# Altium PCB Copy of PCB1.PcbDoc
Units mil, origin at the board's own origin, x right, y up, seen from the top; angles counter-clockwise.
Board outline 6000 x 4000 mil, 2 copper layers (Top Layer, Bottom Layer); 46 components, 42 nets, 185 pads, 0 vias.
Unrouted connection lines stored in the file: 111.
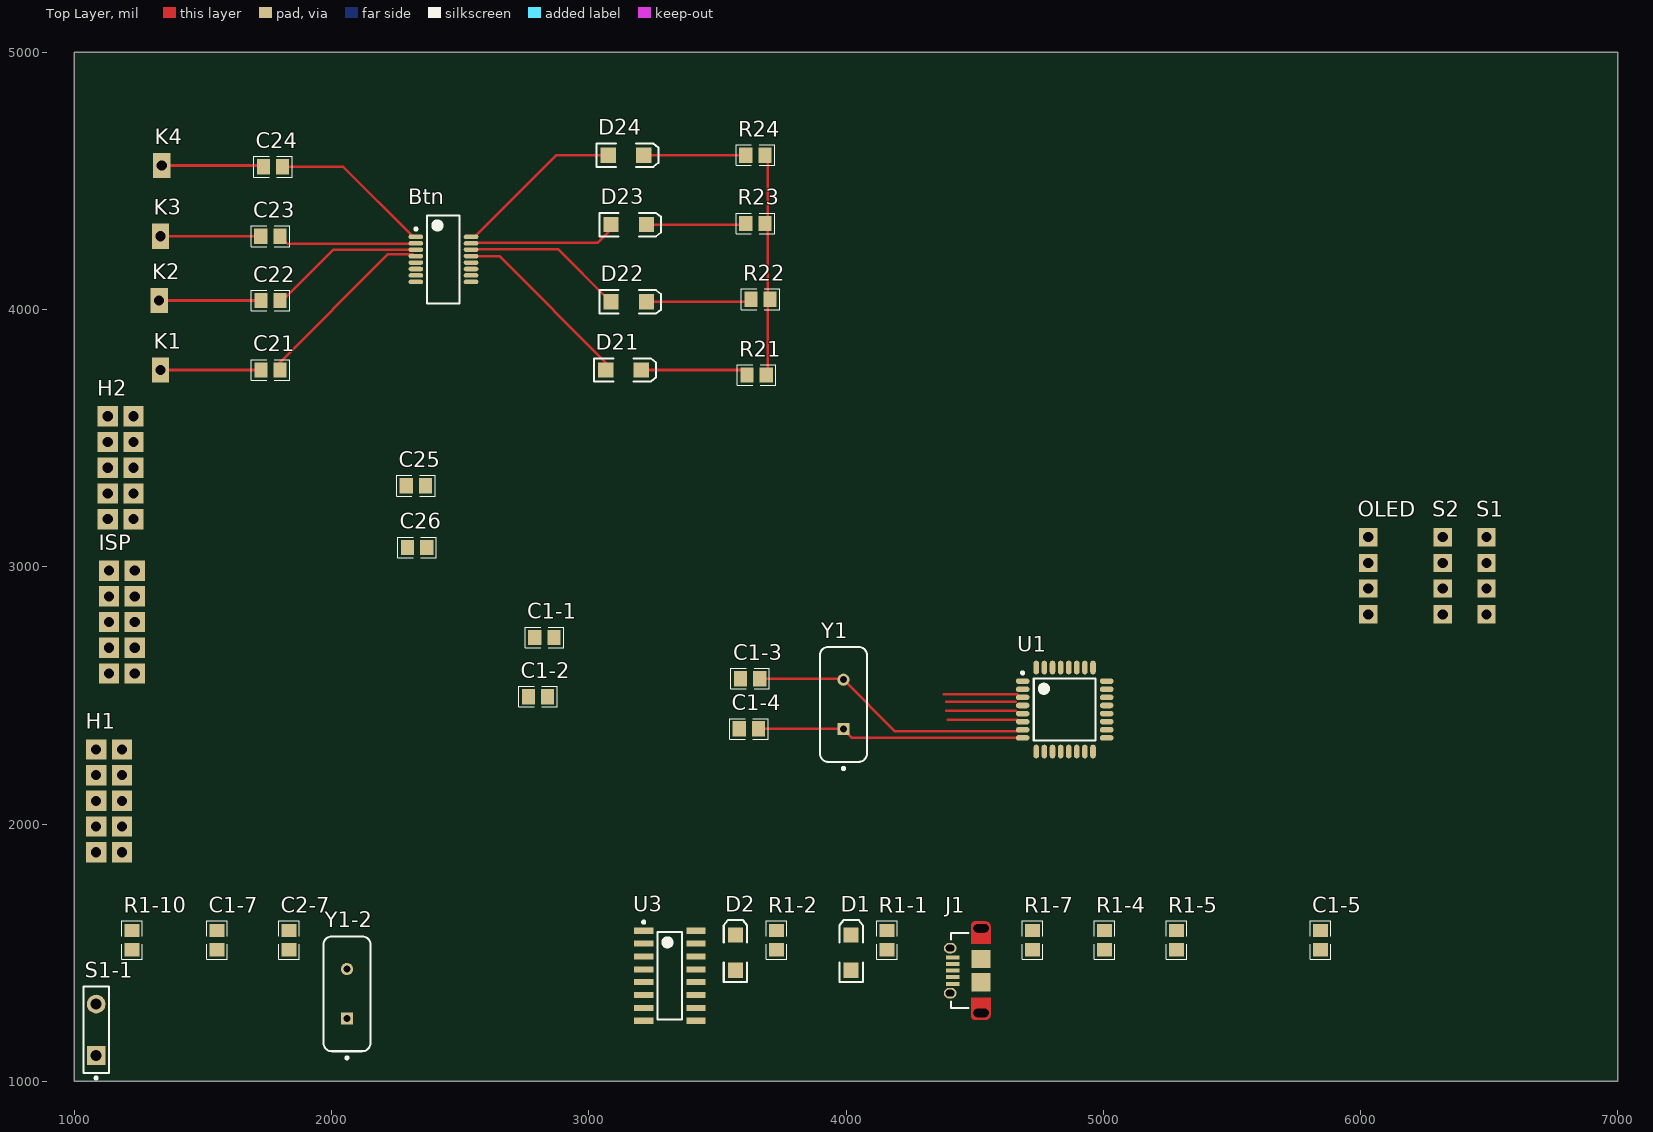
[diagram p0: Top Layer view]
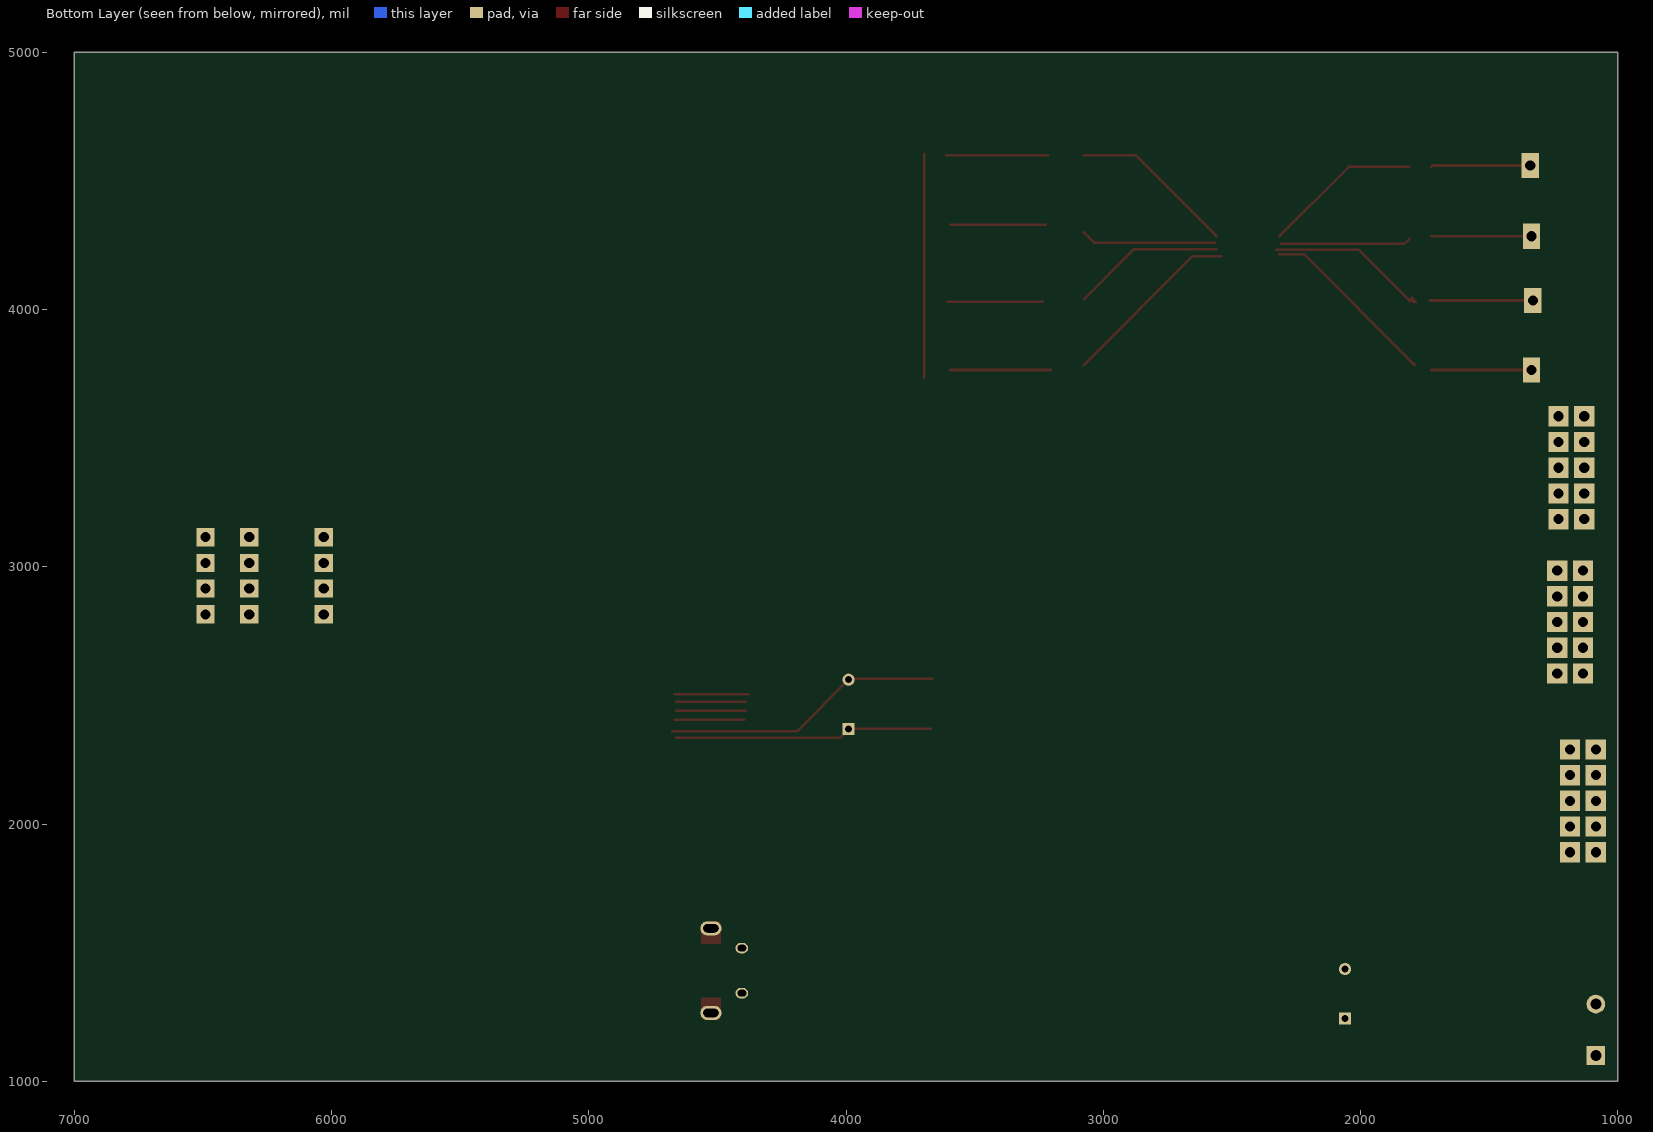
[diagram p1: Bottom Layer view, seen from below]

## Layer stack, top to bottom
Top Solder: solder mask 0.4, Solder Resist, Dk 3.5
Top Layer: signal copper 1.4
Dielectric 1: dielectric 12.6, FR-4, Dk 4.8
Bottom Layer: signal copper 1.4
Bottom Solder: solder mask 0.4, Solder Resist, Dk 3.5

## Board outline
1000,1000 7000,1000 7000,5000 1000,5000

## Design rules (kind name [scope] priority, off if disabled: settings)
AcuteAngle [All] p1: minimum=9.00000000000000E+0001 checktracksonly=FALSE
Clearance [All] p1: gap=6 ignorepadtopadclearanceinfootprint=TRUE
HoleSize [All] p1: absolutevalues=TRUE maxlimit=200 minlimit=1 maxpercent=80.000 minpercent=20.000
PolygonConnect [All] p1: connectstyle=Relief reliefconductorwidth=10 reliefentries=4 polygonreliefangle="90 Angle" airgapwidth=10
RoomDefinition TTP224 [InComponentClass('TTP224')] p1: confinementstyle=ConfineIn formatcopy=TRUE lockcomponents=FALSE outline 0,0 2000,0 2000,1000 0,1000
RoomDefinition main [InComponentClass('main')] p2: confinementstyle=ConfineIn formatcopy=TRUE lockcomponents=FALSE outline 7045,1060 7445,1060 7445,1560 7045,1560
RoutingVias [All] p1: holewidth=28 width=30 viastyle="Through Hole" minholewidth=28 minwidth=20 maxholewidth=28 maxwidth=50
SolderMaskExpansion [All] p1: expansion=4 istentingtop=FALSE
UnRoutedNet [All] p1: checkbadconnections=TRUE
Width [All] p1: maxlimit=30 minlimit=10 preferedwidth=15
28 further rules are at their usual default settings.

## Classes and differential pairs
component class TTP224: Btn C21 C22 C23 C24 C25 C26 D21 D22 D23 D24 H1 H2 K1 K2 K3 K4 R21 R22 R23 R24
component class main: C1-1 C1-2 C1-3 C1-4 C1-5 C1-7 C2-7 D1 D2 ISP J1 OLED R1-1 R1-2 R1-4 R1-5 R1-7 R1-10 S1 S1-1 S2 U1 U3 Y1 Y1-2

## Components (designator, comment, footprint, x,y, rotation, side; value= is the part's Value field where it differs from the comment)
Btn "Btn" SOP64P600X175-16N 2435,4195 r0 top
C1-1 "CAP" 0805 2154.29,3529.84 r0 top value=0.1uF
C1-2 "CAP" 0805 2129.29,3299.84 r0 top value=0.1uF
C1-3 "CAP" 0805 2954.29,3369.84 r0 top value=0.1uF
C1-4 "CAP" 0805 2949.29,3174.84 r0 top value=0.1uF
C1-5 "CAP" 0805 5040,875 r90 top value=0.1uF
C1-7 "CAP" 0805 750,875 r90 top value=22pF
C2-7 "CAP" 0805 1030,875 r90 top value=22pF
C21 "CAP" 0805 1089.29,4569.84 r0 top value=30pF
C22 "CAP" 0805 1089.29,4839.84 r0 top value=30pF
C23 "CAP" 0805 1089.09,5089.84 r0 top value=30pF
C24 "CAP" 0805 1099.09,5359.84 r0 top value=30pF
C25 "CAP" 0805 1654.29,4119.84 r0 top value=30pF
C26 "CAP" 0805 1659.29,3879.84 r0 top value=30pF
D1 "LED2" 3.2X1.6X1.1 4020,1500 r90 top
D2 "LED2" 3.2X1.6X1.1 3570,1500 r90 top
D21 "LED2" 3.2X1.6X1.1 3135,3765 r0 top
D22 "LED2" 3.2X1.6X1.1 3155,4030 r0 top
D23 "LED2" 3.2X1.6X1.1 3155,4330 r0 top
D24 "LED2" 3.2X1.6X1.1 3145,4600 r0 top
H1 "Header 2x5" "Header 2x5 male" 1085,2290 r0 top
H2 "Header 2x5" "Header 2x5 male" 1130,3585 r0 top
ISP "Header 2x5" "Header 2x5 male" 1135,2985 r0 top
J1 "629105150921" 629105150921 4525,1430 r90 top
K1 "Header 1x1" "Header 1x1 long" 1335,3765 r0 top
K2 "Header 1x1" "Header 1x1 long" 1330,4035 r0 top
K3 "Header 1x1" "Header 1x1 long" 1335,4285 r0 top
K4 "Header 1x1" "Header 1x1 long" 1340,4560 r0 top
OLED "Header 1x4" "Header 1x4 male" 6030,3015 r90 top
R1-1 "RES" 0805 3355,875 r90 top
R1-2 "RES" 0805 2925,875 r90 top
R1-4 "RES" 0805 4200,875 r90 top
R1-5 "RES" 0805 4480,875 r90 top
R1-7 "RES" 0805 3920,875 r90 top
R1-10 "RES" 0805 420,875 r90 top
R21 "RES" 0805 2979.09,4549.84 r0 top
R22 "RES" 0805 2994.29,4844.84 r0 top
R23 "RES" 0805 2974.09,5139.84 r0 top
R24 "RES" 0805 2974.29,5404.84 r0 top
S1 "Header 1x4" "Header 1x4 male" 6490,3015 r90 top
S1-1 "SW-PB" SPST-2 1085,1200 r90 top
S2 "Header 1x4" "Header 1x4 male" 6320,3015 r90 top
U1 "ATmega328P-AU" "32A_L - duplicate" 4850,2445 r0 top
U3 "CH340G" SOIC127P600X170-16N 3315,1410 r0 top
Y1 "FOXSLF/160-20" FOX-FOXSLF160-20 3990,2465 r90 top
Y1-2 "FOXSLF/160-20" FOX-FOXSLF160-20 2060,1340 r90 top

## Footprints (in the part's own frame and the unit in brackets; to place one, negate y for a bottom-side part, rotate by r counter-clockwise, add the part's x,y. Pads: shape width x height; smd on the part's side, far side on the other; paste and mask are expansions set on the pad)
3.2X1.6X1.1 [mm] "SMT LED; 2 Flat Leads"
  rect 1.5x1.5 smd: 1(-1.75,0) 2(1.75,0)
  silkscreen extent -2.9,-1.15 3.2,1.15
"32A_L - duplicate" [mm] "Thin QFP, 32-Leads, Body 7x7mm, Pitch 0.8mm, IPC High Density"
  oval 1.35x0.55 smd: 1(-4.15,2.8) 2(-4.15,2) 3(-4.15,1.2) 4(-4.15,0.4) 5(-4.15,-0.4) 6(-4.15,-1.2) 7(-4.15,-2) 8(-4.15,-2.8) 17(4.15,-2.8) 18(4.15,-2) 19(4.15,-1.2) 20(4.15,-0.4) 21(4.15,0.4) 22(4.15,1.2) 23(4.15,2) 24(4.15,2.8)
  oval 0.55x1.35 smd: 9(-2.8,-4.15) 10(-2,-4.15) 11(-1.2,-4.15) 12(-0.4,-4.15) 13(0.4,-4.15) 14(1.2,-4.15) 15(2,-4.15) 16(2.8,-4.15) 25(2.8,4.15) 26(2,4.15) 27(1.2,4.15) 28(0.4,4.15) 29(-0.4,4.15) 30(-1.2,4.15) 31(-2,4.15) 32(-2.8,4.15)
  silkscreen extent -4.27,-3.05 3.05,3.75, body extent -3.5,-3.5 3.5,3.5, height 1.2
0805 [mm]
  rect 1.3x1.5 smd: 1(16.152,-20.443) 2(18.052,-20.443)
  silkscreen extent 15.2,-21.46 19.01,-19.43, body extent 15.96,-20.95 18.25,-19.93, height 1
629105150921 [mm] "Micro USB 2.0 Type AB Horizontal"
  rect 0.4x1.35 smd: 1(-1.3,2.805) 2(-0.65,2.805) 3(0,2.805) 4(0.65,2.805) 5(1.3,2.805)
  round 0 / inner oval 1.4x2.1 / far side oval 1.4x2.1 hole 0.825 slot 1.5 at 90 deg mask+0.102: Shell(-4.175,0)
  oval 1.05x1.25 hole 0.65 slot 0.85 at 90 deg: Shell(-2.225,3.055) Shell(2.225,3.055)
  rect 1.8x1.9 smd: Shell(-1.15,0) Shell(1.15,0)
  round 0 / inner round 0 / far side oval 1.4x2.1 hole 0.825 slot 1.5 at 90 deg mask+0.102: Shell(4.175,0)
  Top Layer region: 4.353,-0.95 4.544,-0.912 4.706,-0.804 4.814,-0.641 4.852,-0.45 4.852,-0.45 4.852,0.65 4.83,0.765 4.765,0.862 4.667,0.927 4.553,0.95 4.553,0.95 2.668,0.95 2.668,-0.95
  Top Layer region: -4.353,-0.95 -4.544,-0.912 -4.706,-0.804 -4.814,-0.641 -4.852,-0.45 -4.852,-0.45 -4.852,0.65 -4.83,0.765 -4.765,0.862 -4.667,0.927 -4.553,0.95 -4.553,0.95 -2.668,0.95 -2.668,-0.95
  silkscreen extent -3.7,1.25 3.7,2.97, body extent -4.3,-2.64 4.3,3.23, height 2.76
FOX-FOXSLF160-20 [mm] "THD, 2-Leads, Body 11.35x4.65mm"
  rect 1.2x1.2 hole 0.7: 1(-2.44,0)
  round 1.2 hole 0.7: 2(2.44,0)
  silkscreen extent -6.45,-2.32 5.68,2.32, body extent -5.67,-2.32 5.68,2.33, height 3.6
"Header 1x1 long" [mm] "2.54mm"
  rect 1.7x2.5 hole 1: 1(0,0)
"Header 1x4 male" [mm] "2.54mm"
  rect 1.8x1.8 hole 1: 1(-5.08,0) 2(-2.54,0) 3(0,0) 4(2.54,0)
  body extent -6.35,-1.27 3.81,1.27, height 8.6
"Header 2x5 male" [mm]
  rect 2x2 hole 1: 1(0,0) 2(2.54,0) 3(0,-2.54) 4(2.54,-2.54) 5(0,-5.08) 6(2.54,-5.08) 7(0,-7.62) 8(2.54,-7.62) 9(0,-10.16) 10(2.54,-10.16)
  body extent -1.27,-11.43 3.81,1.27, height 8.6
SOIC127P600X170-16N [mm] "SOIC, 16-Leads, Body 8.6x4.0mm (max), Pitch 1.27mm, IPC Medium Density"
  rect 1.9x0.6 smd: 1(-2.575,4.445) 2(-2.575,3.175) 3(-2.575,1.905) 4(-2.575,0.635) 5(-2.575,-0.635) 6(-2.575,-1.905) 7(-2.575,-3.175) 8(-2.575,-4.445) 9(2.575,-4.445) 10(2.575,-3.175) 11(2.575,-1.905) 12(2.575,-0.635) 13(2.575,0.635) 14(2.575,1.905) 15(2.575,3.175) 16(2.575,4.445)
  silkscreen extent -2.7,-4.3 1.22,5.42, body extent -1.98,-4.28 1.97,4.28, height 1.7
SOP64P600X175-16N [mm] "SOP, 16-Leads, Body 8.65x3.90mm, Pitch 0.64mm, IPC Medium Density"
  oval 1.45x0.45 smd: 1(-2.725,2.222) 2(-2.725,1.587) 3(-2.725,0.953) 4(-2.725,0.318) 5(-2.725,-0.318) 6(-2.725,-0.953) 7(-2.725,-1.587) 8(-2.725,-2.222) 9(2.725,-2.222) 10(2.725,-1.587) 11(2.725,-0.953) 12(2.725,-0.318) 13(2.725,0.318) 14(2.725,0.953) 15(2.725,1.587) 16(2.725,2.222)
  silkscreen extent -2.85,-4.35 1.6,4.35, body extent -2,-4.35 2,4.35, height 1.75
SPST-2 [mm] "Switch; 2 Leads"
  rect 1.85x1.85 hole 1.1: 1(-2.54,0)
  round 1.85 hole 1.1: 2(2.54,0)
  silkscreen extent -4.89,-1.27 4.28,1.27

## Part data
C1-1 C1-2 C1-3 C1-4 C1-5 C1-7 C2-7 C21 C22 C23 C24 C25 C26: "Capacitor"
D1 D2 D21 D22 D23 D24: "Typical RED, GREEN, YELLOW, AMBER GaAs LED", LatestRevisionDate=17-Jul-2002, LatestRevisionNote="Re-released for DXP Platform.", PackageDescription="SM LED; 2 Flat Leads", PackageReference=3.2X1.6X1.1, PackageVersion=Feb-2002, Published=8-Jun-2000, Publisher="Altium Limited"
J1: library part CMP-1502-03249-1, "Micro USB 2.0 Type AB Receptacle WR-COM, Horizontal, SMT", Contact Resistance=30mOhm, Manufacturer="Wurth Elektronik", Operating Temperature=-40to85degC, Rated Current=1.8A, Working Voltage=30VAC, Connector Type=MicroUSB2.0TypeAB, Datasheet URL=https://katalog.we-online.de/em/datasheet/629105150921.pdf, Gender=Receptacle, Manufacturer URL=http://www.we-online.de, Mounting Technology=SMT, Orientation=Horizontal, Package Reference=629105150921, Packaging=TapeandReel, Part Number=629105150921, Publisher=WurthElektronik
R1-1 R1-2 R1-4 R1-5 R1-7 R1-10 R21 R22 R23 R24: "Resistor"
  R1-1 R1-2 R1-10: Vaule=30R
  R1-4 R1-5 R21 R22 R23 R24: Vaule=1K
  R1-7: Vaule=1.5K
S1-1: "Switch", LatestRevisionDate=17-Jul-2002, LatestRevisionNote="Re-released for DXP Platform.", PackageDescription="Switch; 2 Leads", PackageReference=SPST-2, Published=24-Mar-1999, Publisher="Altium Limited"
U1: library part CMP-0095-00269-2_1, "8-bit AVR Microcontroller, 32KB Flash, 1KB EEPROM, 2KB SRAM, 32-pin TQFP, Industrial Grade (-40°C to 85°C)", Code_JEDEC=MS-026-ABA, ComponentLink1Description="Manufacturer URL", ComponentLink1URL=http://www.atmel.com/, ComponentLink2Description="ATmega48A/48PA/88A/88PA/168A/168PA/328/328P Datasheet", ComponentLink2URL=http://www.atmel.com/dyn/resources/prod_documents/doc8271.pdf, ComponentLink3Description="ATmega48A/48PA/88A/88PA/168A/168PA/328/328P Summary", ComponentLink3URL=http://www.atmel.com/dyn/resources/prod_documents/8271S.pdf, DatasheetVersion="revD, May-2011", PackageDescription="32-Lead, 7x7x1.0 mm Body, 0.8mm Lead Pitch, Thin Profile Plastic Quad Flat Package (TQFP)", PackageReference=32A, PackageVersion="revC, Oct-2010", RevisionNote="DatasheetVersion & PackageVersion updated. URLs added."
Y1 Y1-2: library part CMP-1749-00003-1, "Resistance Weld Thru-Hole Crystal, 16 MHz, -20 to 70 degC, 2-Pin THD, RoHS, Bulk", Case\Package=Axial, Max Operating Temperature="155 degC", Min Operating Temperature="-55 degC", Package Quantity=200, Power Rating="250 mW", Resistance="221 kohm", Tolerance=1%, Voltage Rating="250 V", ComponentLink1Description="Manufacturer URL", ComponentLink1URL=http://www.foxonline.com/, ComponentLink2Description=Datasheet, ComponentLink2URL=http://www.foxonline.com/pdfs/hc49slf.pdf, DatasheetVersion=Mar-15, Length="0.248 inch", Mount="Through Hole", PackageDescription="2-Pin Through Hole Device, Body 11.35 x 4.65 mm", PackageReference=FOXSLF160-20, Packaging=Bulk, RoHSCompliant=true

## Nets (pads, with @x,y where several pads share a name; then routed paths per layer and width w, separated by ;. In a path a pad name is that pad's centre, name@x,y a point inside that pad or via, vN(x,y) a via of type N, cw(c..) or ccw(c..) an arc to the next point about the centre after c; other vN are vias at no path point)
5V: Btn.6 C25.2 C26.2 H1.1 H1.3 H1.5 OLED.2 R1-10.1 S1.4 S2.4 U3.15
D+: D1.2 J1.2 R1-1.1 R1-7.1 U3.5
D-: D2.2 J1.3 R1-2.1 U3.6
Echo: S2.2 U1.27
Echo2: S1.2 U1.10
GND: Btn.2 Btn.3 Btn.4 Btn.10 C1-1.2 C1-2.2 C1-3.2 C1-4.2 C1-5.1 C1-5.2 C1-7.1 C2-7.1 C21.1 C22.1 C22.2 C23.1 C23.2 C24.1 C24.2 C25.1 C26.1 D1.1 D2.1 H2.6 H2.8 H2.10 ISP.6 J1.5 K2.1 K3.1 K4.1 OLED.1 R1-7.2 R21.2 R22.2 R23.2 R24.2 S1-1.1 S1.1 S2.1 U1.3 U1.5 U1.21 U3.1
MISO: ISP.1 U1.16
MOSI: ISP.4 U1.15
NetBtn_1: Btn.1 C21.2 K1.1
NetBtn_5: Btn.5 H1.2
NetBtn_7: Btn.7 H1.4
NetBtn_8: Btn.8 H1.6
NetBtn_9: Btn.9 H2.9
NetBtn_11: Btn.11 H2.7
NetBtn_12: Btn.12 H2.5
NetC1-1_1: C1-1.1 U1.4 U1.6 U1.18
NetC1-2_1: C1-2.1 U1.20
NetC1-3_1: C1-3.1 U1.7 Y1.2
NetC1-4_1: C1-4.1 U1.8 Y1.1
NetC1-7_2: C1-7.2 U3.7 Y1-2.1
NetC2-7_2: C2-7.2 U3.8 Y1-2.2
NetD21_2: D21.2 R21.1
NetD22_2: D22.2 R22.1
NetD23_2: D23.2 R23.1
NetD24_2: D24.2 R24.1
NetR1-1_2: R1-1.2 U1.9
NetR1-2_2: R1-2.2 U1.32
NetR1-4_1: R1-4.1 U1.31
NetR1-5_1: R1-5.1 U1.30
OUT1: Btn.16 D21.1 U1.23
OUT2: Btn.15 D22.1 U1.24
OUT3: Btn.14 D23.1 U1.25
OUT4: Btn.13 D24.1 U1.26
RESET: ISP.5 R1-10.2 S1-1.2 U1.29
RX: R1-5.2 U3.3
SCK: ISP.3 U1.17
SCL: OLED.3 U1.13
SDA: OLED.4 U1.12
Trigger: S1.3 U1.28
Trigger2: S2.3 U1.11
TX: R1-4.2 U3.2
VBUS: ISP.2 J1.1
pads on no net: H1.7 H1.8 H1.9 H1.10 H2.1 H2.2 H2.3 H2.4 ISP.7 ISP.8 ISP.9 ISP.10 J1.4 J1.Shell U1.1 U1.2 U1.14 U1.19 U1.22 U3.4 U3.9 U3.10 U3.11 U3.12 U3.13 U3.14 U3.16
copper on no net: | length 12088.2
  Top Layer w10: 1335,3765 1725.2,3765 ; 1335,4285 1725,4285 ; 1340,4035 1730,4035 ; 1340,4560 1720,4560 1725,4555 ; 1790,3785 2220,4215 2315,4215 ; 1795,4030 1785,4030 1800,4045 ; 1800,4035 1810,4035 2007.5,4232.5 2327.72,4232.5 ; 1809.8,4275 1829.8,4255 2310,4255 ; 1809.8,4555 2042.5,4555 ; 2040,4555 2045,4555 2315,4285 ; 2542.28,4207.5 2652.5,4207.5 3075,3785 ; 2560,4235 2880,4235 3075,4040 ; 2560,4285 2875,4600 3076.1,4600 ; 2565,4260 3035,4260 3075,4300 ; 3203.9,3765 3595,3765 ; 3213.9,4600 3610.2,4600 ; 3223.9,4330 3595,4330 ; 3235,4030 3605,4030 ; 3665,2565 3986.06,2565 3990,2561.06 4191.06,2360 4675,2360 ; 3670,2370 3980,2370 ; 3695,3735 3695,4345.2 3695,4605 ; 3990,2368.94 4023.94,2335 4660,2335 ; 4380,2505 4665,2505 ; 4390,2440 4660,2440 ; 4390,2475 4660,2475 ; 4395,2405 4665,2405

## Text inside footprints (layer, text, board x,y; h text height)
J1: Mechanical 2 "PCB Edge" at 4603.74,1386.69 h16 r90